# Altium PCB PCB1.PcbDoc
Units mil, origin at the board's own origin, x right, y up, seen from the top; angles counter-clockwise.
Board outline 5920 x 5875 mil, 2 copper layers (Top Layer, Bottom Layer); 13 components, 17 nets, 79 pads, 3 vias.
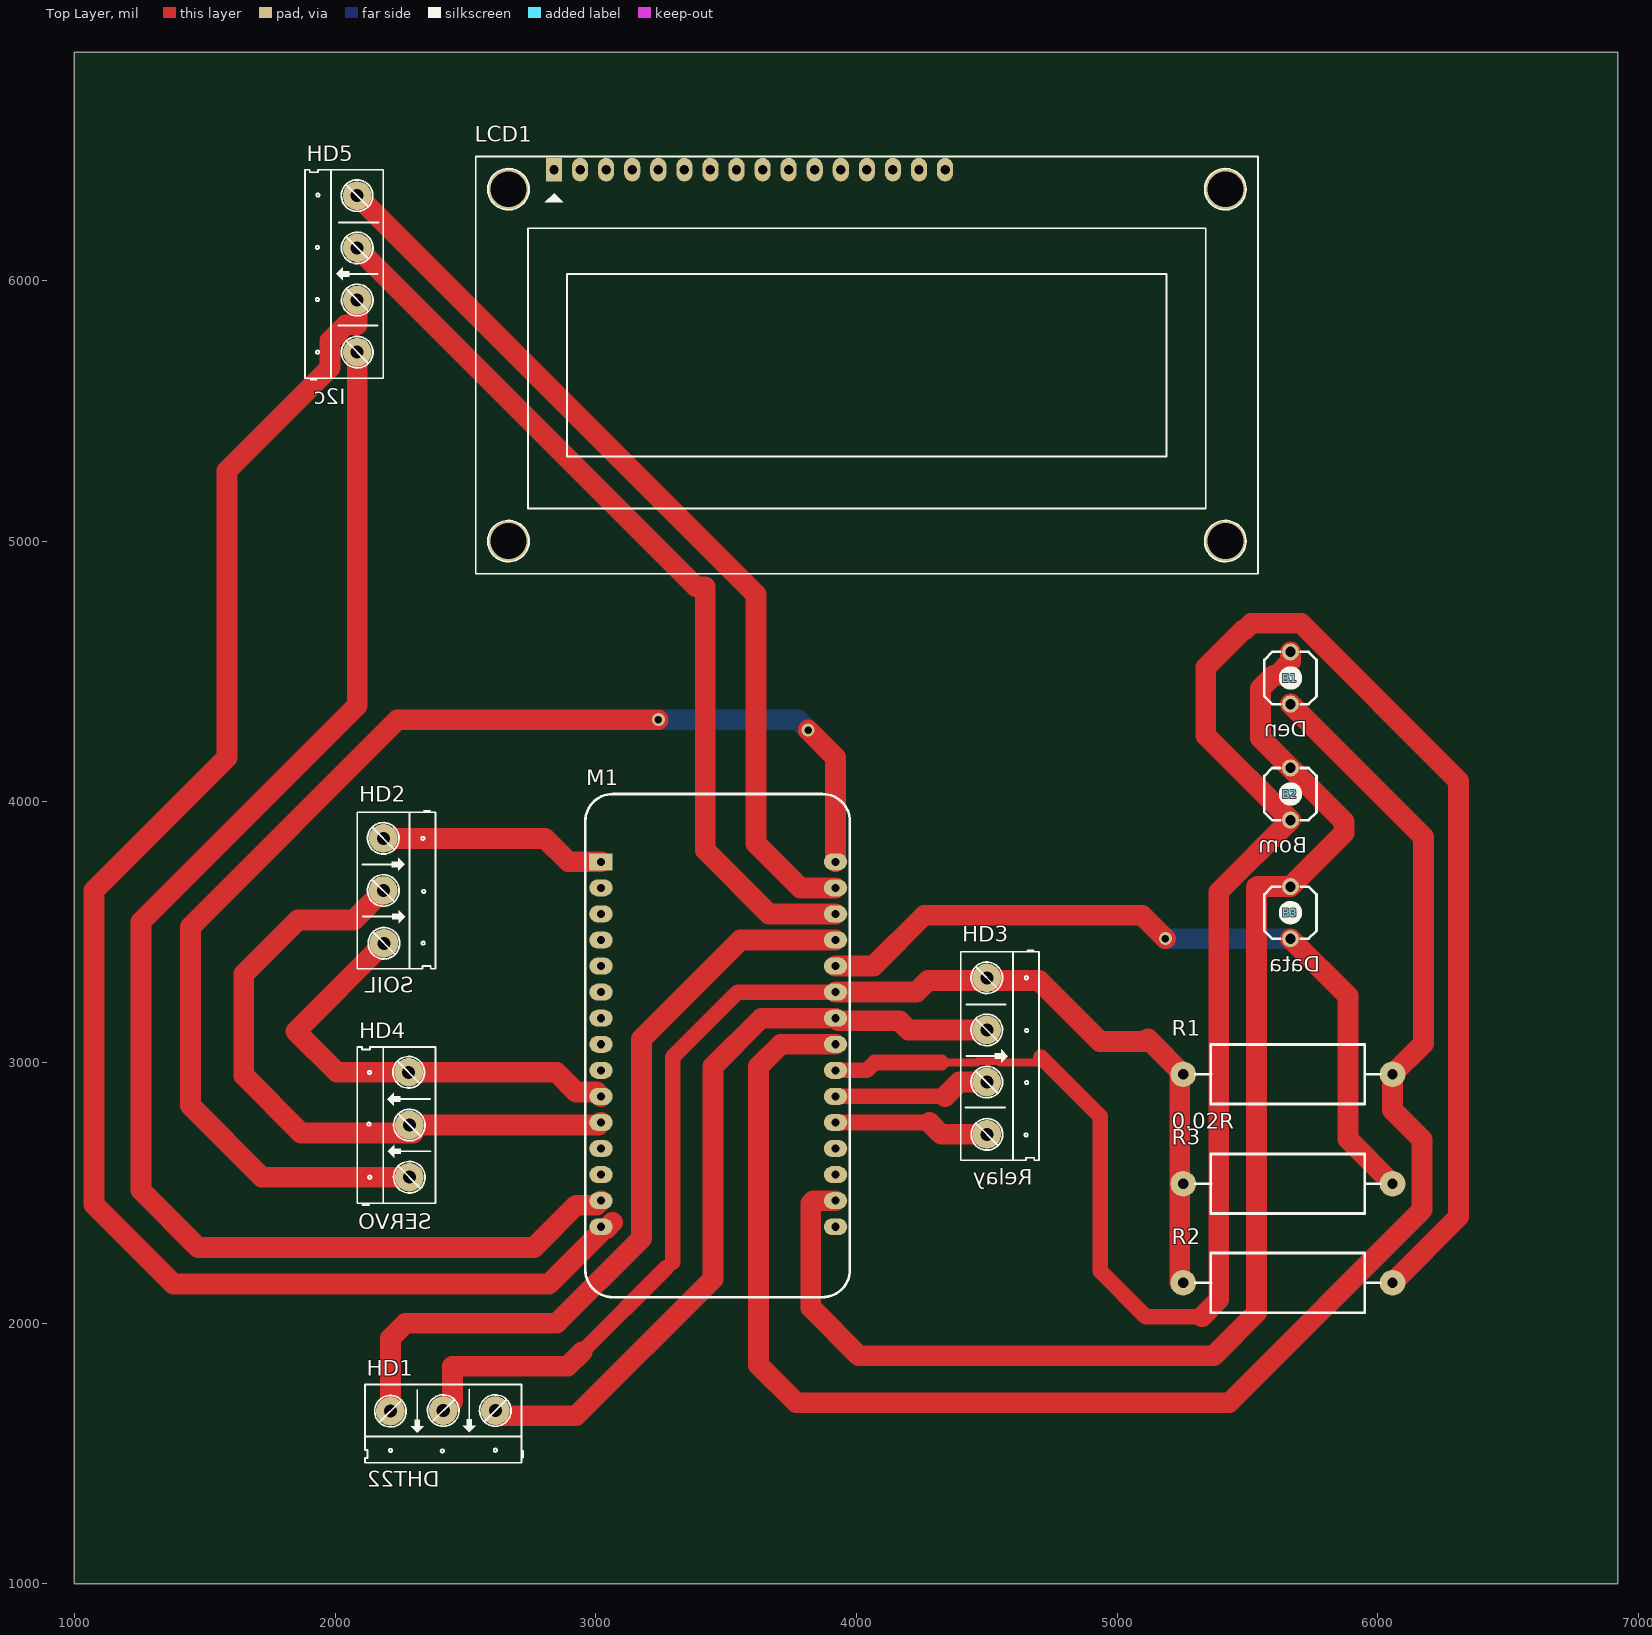
[diagram p0: Top Layer view]
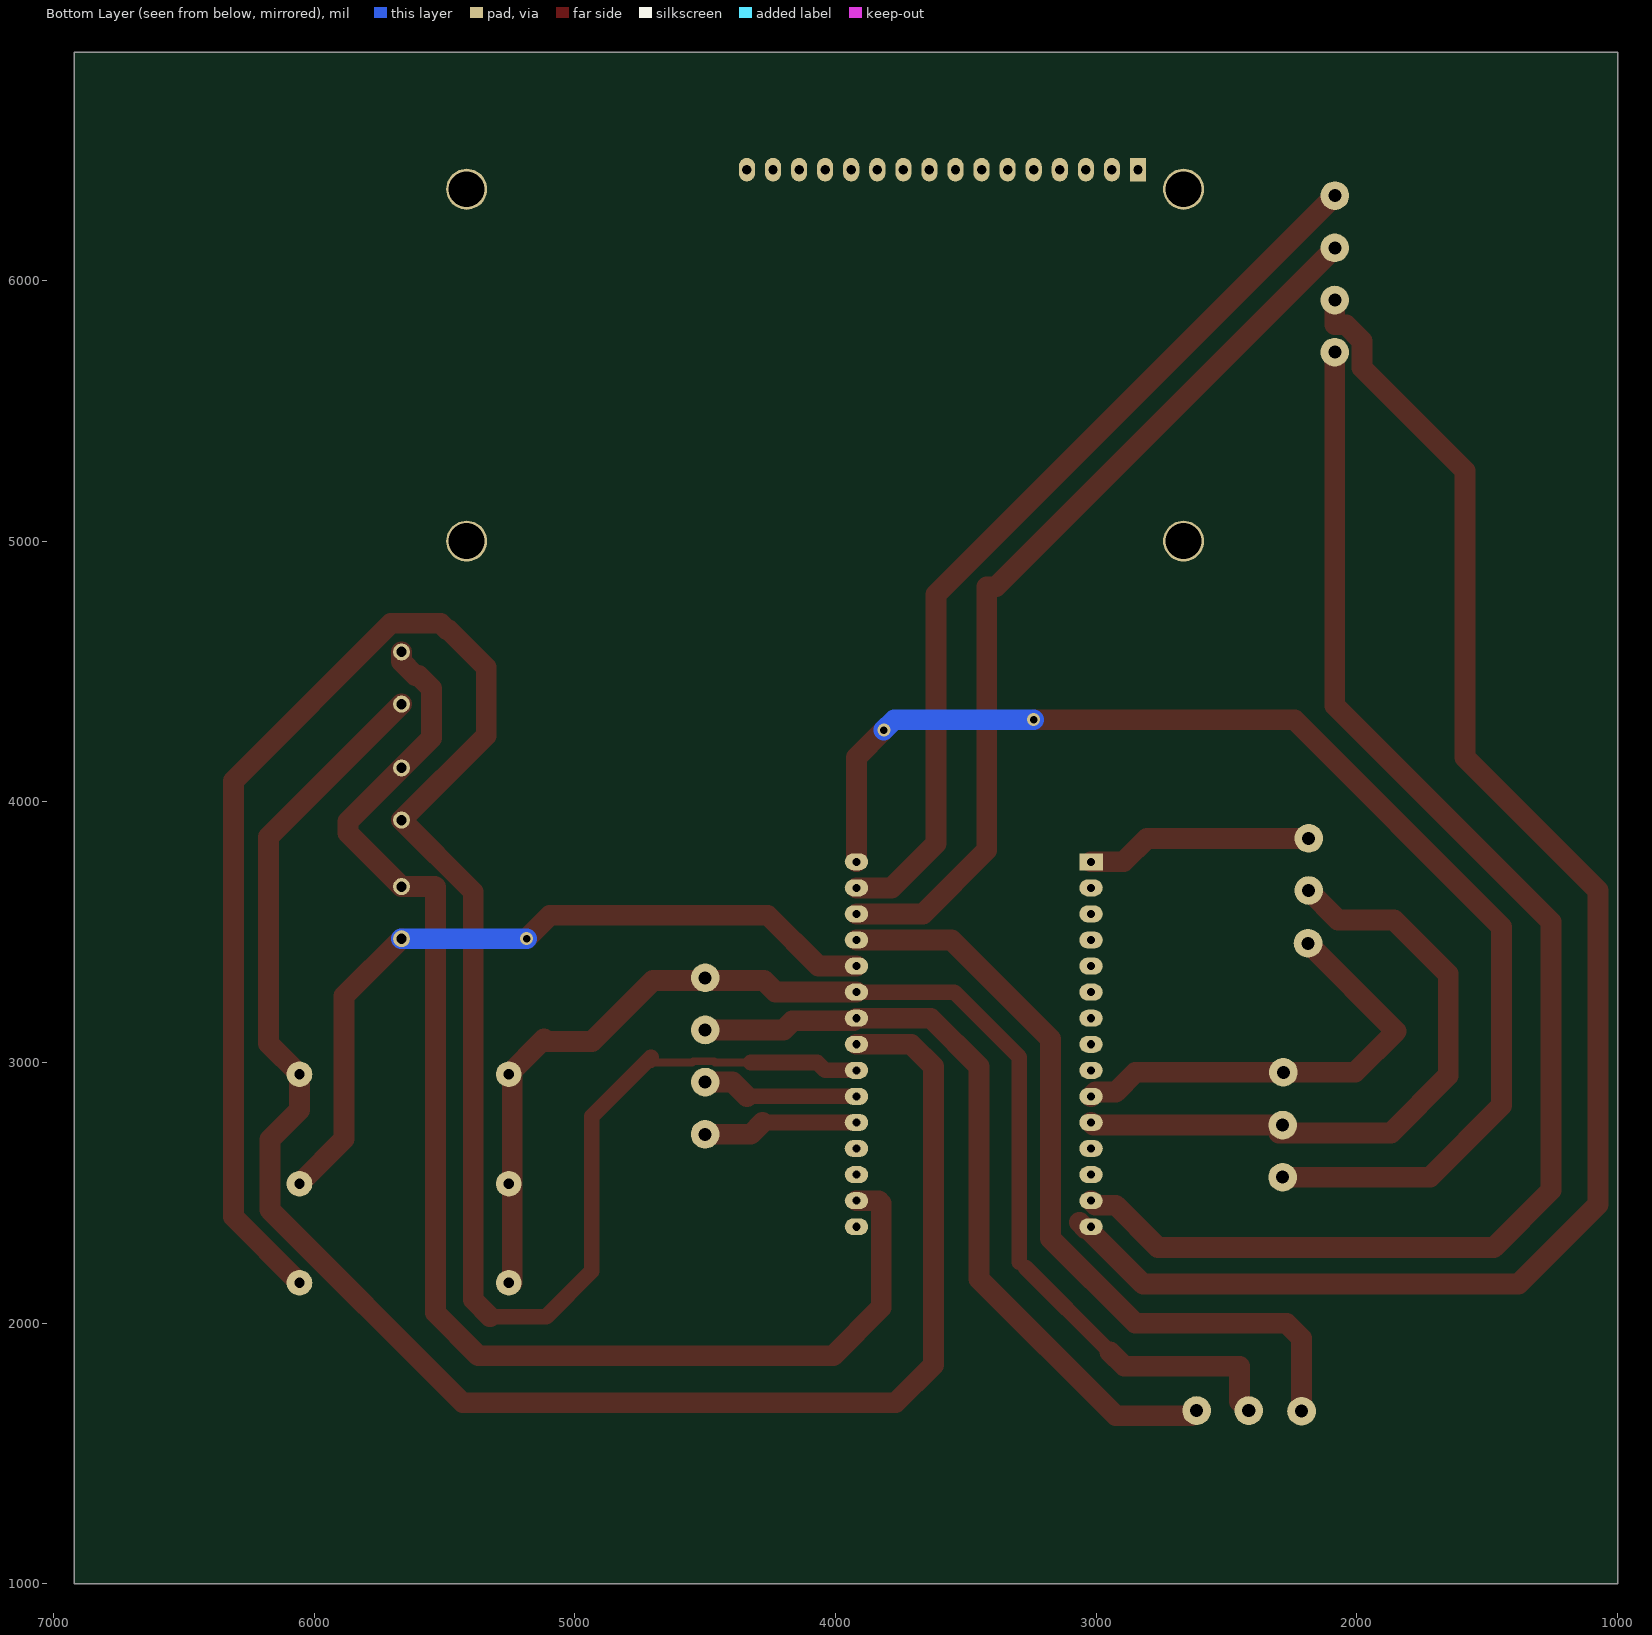
[diagram p1: Bottom Layer view, seen from below]

## Layer stack, top to bottom
Top Solder: solder mask 0.4, Solder Resist, Dk 3.5
Top Layer: signal copper 1.4
Dielectric 1: dielectric 12.6, FR-4, Dk 4.8
Bottom Layer: signal copper 1.4
Bottom Solder: solder mask 0.4, Solder Resist, Dk 3.5

## Board outline
1000,1000 6920,1000 6920,6875 1000,6875

## Design rules (kind name [scope] priority, off if disabled: settings)
Clearance [All] p1: gap=10 ignorepadtopadclearanceinfootprint=FALSE except(0: Arc-Hole Track-Hole SMDPad-Hole THPad-Hole Via-Hole Fill-Hole Poly-Hole Region-Hole Text-Hole)
PolygonConnect [All] p1: connectstyle=Relief reliefconductorwidth=10 reliefentries=4 polygonreliefangle="90 Angle" airgapwidth=10
RoutingVias [All] p1: holewidth=28 width=50 viastyle="Through Hole" minholewidth=28 minwidth=50 maxholewidth=28 maxwidth=50
SolderMaskExpansion [All] p1: expansion=4
Width [All] p1: maxlimit=80 minlimit=30 preferedwidth=60
30 further rules are at their usual default settings.

## Classes and differential pairs
component class Sheet3: B1 B2 HD1 HD2 HD3 HD4 HD5 LCD1 R1 R2 R3

## Components (designator, comment, footprint, x,y, rotation, side; value= is the part's Value field where it differs from the comment)
B1 "Den" "Button 2 Pin" 5665,4475 r90 top
B2 "Bom" "Button 2 Pin" 5665,4030 r90 top
B3 "Data" "Button 2 Pin" 5665,3575 r90 top
HD1 "DHT22" HED3 2615,1665 r180 top value="Header 3"
HD2 "SOIL" HED3 2185,3860 r270 top value="Header 3"
HD3 "Relay" HED4 4500,3325 r270 top value="Header 4"
HD4 "SERVO" HED3 2285,2560 r90 top value="Header 3"
HD5 "I2c" HED4 2085.06,5724.94 r90 top value="Header 4"
LCD1 "LCD 16x2A" LCD16X2 2840,6425 r0 top value=LCD16x2A
M1 "NodeMCU ESP8266" "NodeMCU ESP8266" 3470,3070 r0 top
R1 "0.02R" "tro vach 3w" 5655,2955 r0 top
R2 "0.02R" "tro vach 3w" 5655,2155 r0 top
R3 "0.02R" "tro vach 3w" 5655,2535 r0 top

## Footprints (in the part's own frame and the unit in brackets; to place one, negate y for a bottom-side part, rotate by r counter-clockwise, add the part's x,y. Pads: shape width x height; smd on the part's side, far side on the other; paste and mask are expansions set on the pad)
"Button 2 Pin" [mil] "Button 200mil 2 Pin"
  round 65 hole 40: 1(-100,0) 2(100,0)
  silkscreen extent -100,-100 100,100
HED3 [mil] "Header 3, 3 pin, hight 300mil, Pin to Pin 200, Colour Green"
  round 110 hole 50: 1(0,0) 2(200,0) 3(402.62,2.62)
  silkscreen extent -106,-100 500,200
HED4 [mil] "Header 4, 4 pin, hight 300mil, Pin to Pin 200, Colour Green"
  round 110 hole 50: 1(0,0) 2(200,0) 3(400.06,0.06) 4(600.39,0.39)
  silkscreen extent -106,-100 700,200
LCD16X2 [mil] "LCD dipslay 16x2, 16 pin"
  rect 62x90 hole 36: 1(0,0)
  oval 62x90 hole 36: 2(100,0) 3(200,0) 4(300,0) 5(400,0) 6(500,0) 7(600,0) 8(700,0) 9(800,0) 10(900,0) 11(1000,0) 12(1100,0) 13(1200,0) 14(1300,0) 15(1400,0) 16(1500,0)
  round 157.48 hole 137.8: "Hole 0"(-175,-1425) "Hole 0"(-175,-75) "Hole 0"(2575,-1425) "Hole 0"(2575,-75)
  silkscreen extent -300,-1550 2700,50, body extent -315,-1360 2855,77, height 414
"NodeMCU ESP8266" [mil] "NodeMCU ESP8266"
  rect 90x65 hole 31: 1(-450,700)
  oval 90x65 hole 31: 2(-450,600) 3(-450,500) 4(-450,400) 5(-450,300) 6(-450,200) 7(-450,100) 8(-450,0) 9(-450,-100) 10(-450,-200) 11(-450,-300) 12(-450,-400) 13(-450,-500) 14(-450,-600) 15(-450,-700) 16(450,-700) 17(450,-600) 18(450,-500) 19(450,-400) 20(450,-300) 21(450,-200) 22(450,-100) 23(450,0) 24(450,100) 25(450,200) 26(450,300) 27(450,400) 28(450,500) 29(450,600) 30(450,700)
  silkscreen extent -510,-970 505,960, body extent -506,-966 500,956, height 311
"tro vach 3w" [mm]
  round 2.5 hole 1: 1(-10.2,0) 2(10.2,0)
  silkscreen extent -9.02,-2.9 9.02,2.9, body extent -10.56,-2.5 10.56,2.5, height 7.5

## Part data
B1 B2 B3: library part "Nut Nhan 2 Chan  6x6x5MM", "C?m", Chung_Loai=C?m, Don_Vi=Con, Ma_Hang=MH001959, Ten_Linh_Kien="Nút Nh?n 2 Chân 6x6x5MM DIP"
HD1 HD2 HD4: library part Hed3, "Header 3 (Green)"
HD3 HD5: library part Hed4, "Header 4 (Green)"
LCD1: library part LCD16x2A, "LCD dipslay 16 char, 2 line"
R1 R2 R3: library part "Tro Vach 3W 5% 0.02R", "C?m", Chung_Loai=C?m, Don_Vi=Con, Ma_Hang=MH007953, So_Chan=2, Ten_Linh_Kien="Tr? 5% 3w 0.02R"

## Via types
v1: diameter 50, hole 28, Top Layer to Bottom Layer, 3 vias

## Nets (pads, with @x,y where several pads share a name; then routed paths per layer and width w, separated by ;. In a path a pad name is that pad's centre, name@x,y a point inside that pad or via, vN(x,y) a via of type N, cw(c..) or ccw(c..) an arc to the next point about the centre after c; other vN are vias at no path point)
NetB1_1: B1.1 M1.23 R1.2 | length 6634.1
  Top Layer w80: M1.23 3710,3070 3625,2985 3625,1840 3770,1695 5430,1695 6170,2435 6170,2705 6056.57,2818.43 R1.2 6175,3073.43 6175,3865 B1.1
NetB1_2: B1.2 B2.2 B3.2 M1.17 | length 5290.1
  Top Layer w80: M1.17 3835,2470 3825,2460 3825,2060 4010,1875 5370,1875 5535,2040 5535,3672.72 5537.28,3675 B3.2 5870,3880 5870,3925 B2.2 5550,4245 5550,4435 5600,4485 5612.28,4485 5665,4537.72 B1.2
NetB2_1: B2.1 M1.22 R2.2 | length 8294.7
  Top Layer w30: 4325,3000 4461.99,3000 4466.93,3004.94 4545.06,3004.94 4550,3000 4700,3000 4705.06,2994.94 4733.2,2994.94
  Top Layer w60: M1.22 4040,2970 4070,3000 4325,3000 ; 4708.14,3020 4733.2,2994.94 4935,2793.14 4935,2200 5110,2025 5325,2025
  Top Layer w80: 5325,2025 5390,2090 5390,3655 B2.1 5340,4255 5340,4515 5485,4660 5490,4660 5515,4685 5705,4685 6310,4080 6310,2408.43 R2.2
NetB3_1: B3.1 M1.26 R3.2 | length 2965.2
  Top Layer w80: M1.26 4065,3370 4260,3565 5095,3565 v1(5185,3475) ; B3.1 5885,3255 5885,2706.57 R3.2
  Bottom Layer w80: v1(5185,3475) B3.1
NetHD1_1: HD1.1 HD3.2 M1.24 | length 3021
  Top Layer w80: HD1.1 2635,1645 2925,1645 3450,2170 3450,2985 3635,3170 M1.24 3930,3160 4165,3160 4200,3125 HD3.2
NetHD1_2: HD1.2 HD3.1 M1.25 R1.1 R2.1 R3.1 | length 4993.1
  Top Layer w60: 2947.28,1890 3272.28,2215 ; 3295,2235 3295,3020 3545,3270 M1.25
  Top Layer w80: HD1.2 2450,1700 2450,1835 2892.28,1835 2947.28,1890 ; M1.25 4230,3270 4275,3315 4700,3315 4935,3080 5128.43,3080 ; 5118.43,3090 5128.43,3080 ; R2.1@5240.21,2155 R1.1@5240.21,2955 ; R1.1 5128.43,3080
NetHD1_3: HD1.3 M1.27 | length 3068.5
  Top Layer w80: HD1.3 2212.38,1942.38 2270,2000 2850,2000 3175,2325 3175,3090 3555,3470 M1.27
NetHD2_1: HD2.1 M1.1 | length 872.3
  Top Layer w80: HD2.1 2805,3860 2895,3770 M1.1
NetHD2_2: HD2.2 HD4.2 M1.11 | length 2492.8
  Top Layer w80: HD2.2 2072.38,3547.38 1857.38,3547.38 1650,3340 1650,2950 1870,2730 HD4.2@2300,2730 ; HD4.2@2330,2760 3010,2760 M1.11
NetHD2_3: HD2.3 HD4.3 M1.10 | length 1750.9
  Top Layer w80: HD2.3 1850,3119.76 2007.14,2962.62 HD4.3 2849.88,2962.62 2925,2887.5 3002.5,2887.5 M1.10
NetHD3_3: HD3.3 M1.21 | length 602.8
  Top Layer w60: M1.21 4340,2870
  Top Layer w80: 4340,2870 4394.94,2924.94 HD3.3
NetHD3_4: HD3.4 M1.20 | length 599.2
  Top Layer w60: M1.20 4280,2770
  Top Layer w80: 4280,2770 4325.39,2724.61 HD3.4
NetHD4_1: HD4.1 M1.30 | length 4903.3
  Top Layer w80: HD4.1 1720,2560 1445,2835 1445,3520 2240,4315 v1(3240,4315) ; v1(3815,4275) 3920,4170 M1.30
  Bottom Layer w80: v1(3240,4315) 3775,4315 v1(3815,4275)
NetHD5_1: HD5.1 M1.14 | length 5489.4
  Top Layer w80: HD5.1 2085.06,4370.06 1255,3540 1255,2510 1475,2290 2762.5,2290 2925,2452.5 3002.5,2452.5 M1.14
NetHD5_2: HD5.2 M1.15 | length 6137.5
  Top Layer w80: HD5.2 2085.06,5829.94 2041.57,5829.94 1980.06,5768.43 1980.06,5665.06 1585,5270 1585,4170 1075,3660 1075,2455 1380,2150 2820,2150 3020,2350 3020,2362.5 3041.67,2362.5 3040.73,2363.45 3064.78,2387.5
NetHD5_3: HD5.3 M1.28 | length 3485
  Top Layer w80: HD5.3 3385,4825 3420,4825 3420,3815 3665,3570 M1.28
NetHD5_4: HD5.4 M1.29 | length 3494.6
  Top Layer w80: HD5.4 3615,4795 3615,3840 3785,3670 M1.29
pads on no net: "LCD1.Hole 0" LCD1.1 LCD1.2 LCD1.3 LCD1.4 LCD1.5 LCD1.6 LCD1.7 LCD1.8 LCD1.9 LCD1.10 LCD1.11 LCD1.12 LCD1.13 LCD1.14 LCD1.15 LCD1.16 M1.2 M1.3 M1.4 M1.5 M1.6 M1.7 M1.8 M1.9 M1.12 M1.13 M1.16 M1.18 M1.19

## Silkscreen, mask and mechanical layers (free items; w line width, h text height)
Mechanical 1:
  text "TUANNHAT-PTIT" at 6500,6625 h100